# Altium PCB CC2530.PcbDoc
Units mm, origin at the board's own origin, x right, y up, seen from the top; angles counter-clockwise.
Board outline 70.89 x 30.94 mm, 2 copper layers (Top Layer, Bottom Layer); 62 components, 36 nets, 200 pads, 122 vias.
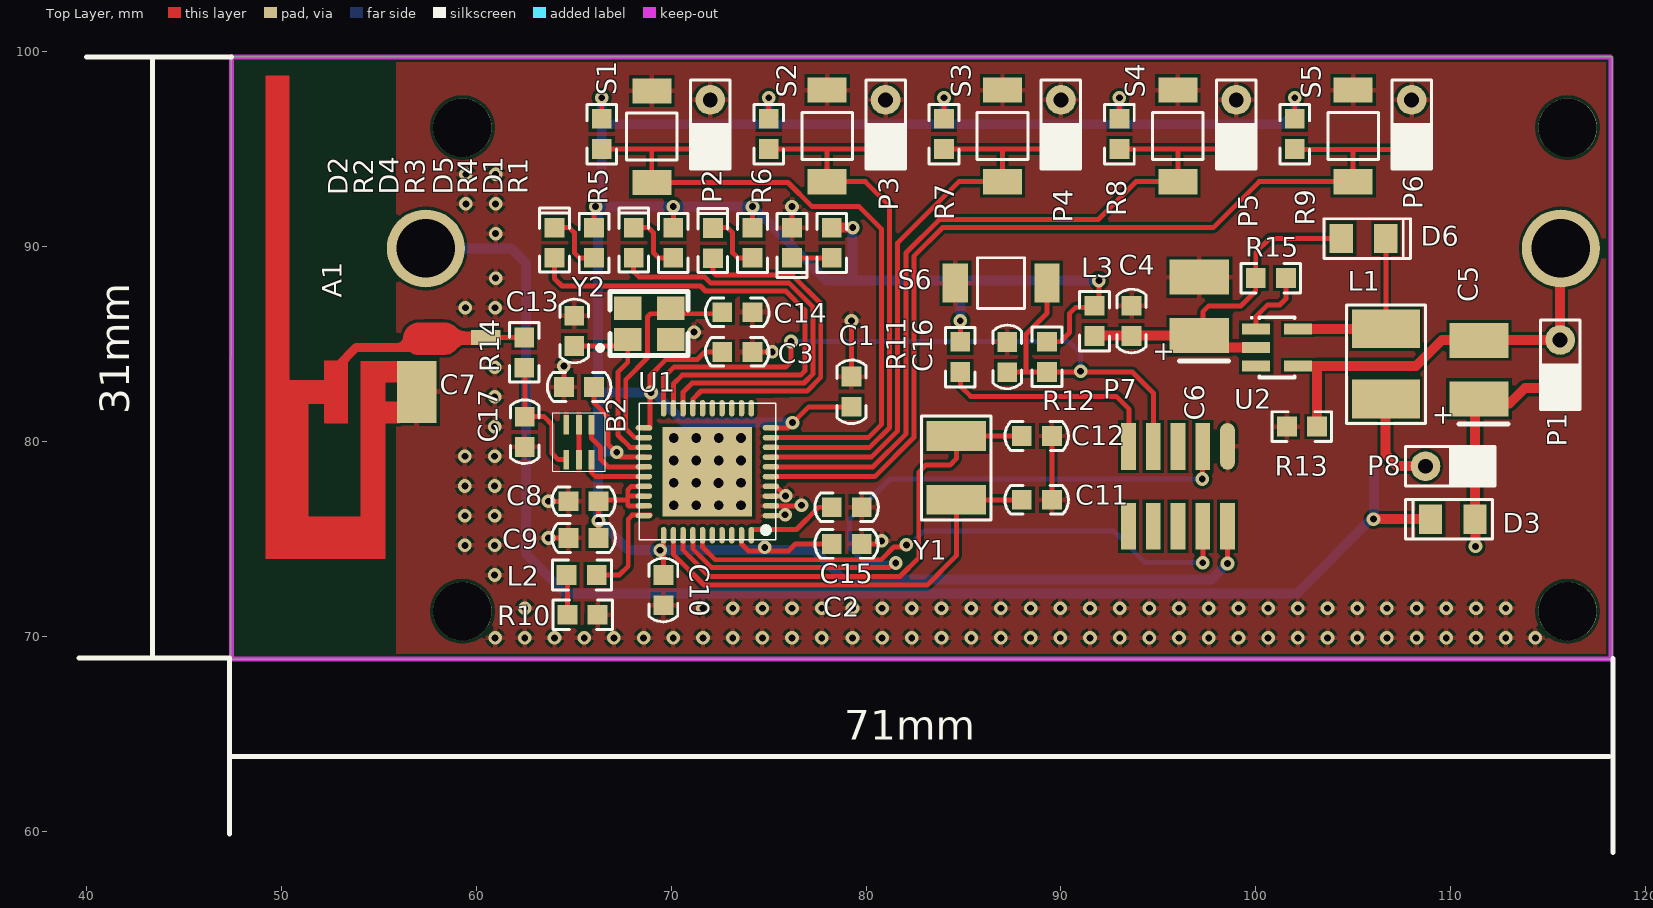
[diagram p0: Top Layer view]
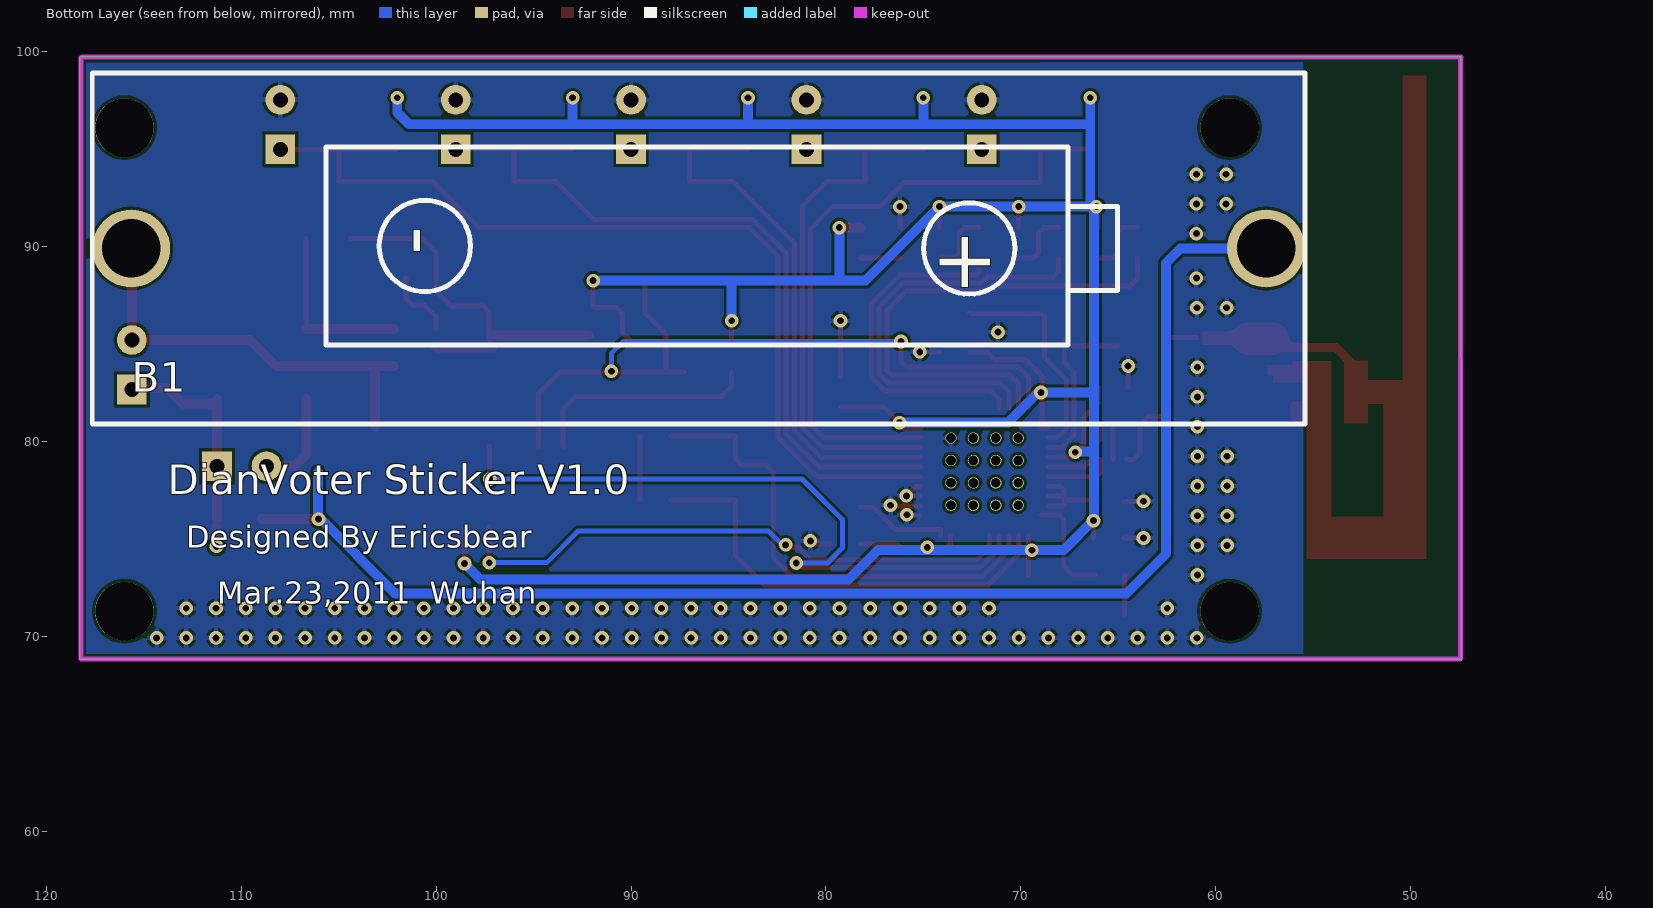
[diagram p1: Bottom Layer view, seen from below]

## Layer stack, top to bottom
Top Layer: signal copper 0.0356
Dielectric: dielectric 0.32, FR-4, Dk 4.8
Bottom Layer: signal copper 0.0356

## Board outline
47.422,99.746 118.288,99.746 118.288,68.834 47.422,68.834 47.396,68.809

## Design rules (kind name [scope] priority, off if disabled: settings)
Clearance [All] p1: gap=0.152
ComponentClearance [All] p1: gap=0.254 collisioncheckmode=3 verticalgap=0.254
PolygonConnect [All] p1: connectstyle=Relief reliefconductorwidth=0.254 reliefentries=4 polygonreliefangle="90 Angle"
RoutingVias [All] p1: holewidth=0.711 width=1.27 viastyle="Through Hole" minholewidth=0.152 minwidth=0.254 maxholewidth=0.711 maxwidth=1.27
SolderMaskExpansion [All] p1: expansion=0.102
TestPointUsage [All] p1: valid=0 allowmultiple=FALSE
Testpoint [All] p1: side=15 testpointundercomponent=TRUE minsize=1.016 maxsize=2.54 preferedsize=1.524 minholesize=0 maxholesize=1.016 preferedholesize=0.813 testpointgrid=0.025 style=1023 order=0123456789
Width [All] p1: maxlimit=1.016 minlimit=0.152 preferedwidth=0.254 minimp=50.000000 maximp=50.000000 favimp=50.000000
18 further rules are at their usual default settings.

## Components (designator, comment, footprint, x,y, rotation, side; value= is the part's Value field where it differs from the comment)
A1 "PCB_AN" AN 60.35,85.344 r90 top
B1 "Battery" Battery 57.404,89.916 r0 bottom locked
B2 "2450BM15A0002" "SSOP 6" 65.253,79.985 r90 top
C1 "C" 0603C 79.248,81.788 r90 top
C2 "C" 0603C 78.232,74.752 r0 top
C3 "C" 0603C 72.619,84.607 r0 top
C4 "C" 0603C 93.624,85.42 r90 top
C5 "DC" 1210C 111.455,83.693 r90 top
C6 "DC" 1210C 97.104,86.944 r90 top
C7 "C" 0603C 66.04,82.804 r180 top
C8 "C" 0603C 66.269,76.937 r180 top
C9 "C" 0603C 66.269,75.057 r180 top
C10 "C" 0603C 69.596,73.152 r270 top
C11 "C" 0603C 87.986,77.013 r0 top
C12 "C" 0603C 87.986,80.289 r0 top
C13 "C" 0603C 65.024,84.912 r90 top
C14 "C" 0603C 72.619,86.639 r0 top
C15 "C" 0603C 78.232,76.632 r0 top
C16 "C" 0603C 87.249,85.115 r270 top
C17 "C" 0603C 62.484,81.28 r270 top
D1 "LED" 0603LED 76.2,89.433 r90 top
D2 "LED" 0603LED 64.008,90.983 r270 top
D3 "1N40005" 0805D 108.966,76.022 r0 top
D4 "LED" 0603LED 68.072,90.983 r270 top
D5 "LED" 0603LED 72.136,90.957 r270 top
D6 "EDZ5.1B" SOD-523 106.68,90.424 r180 top
L1 "Lh" E(1812) 106.68,82.194 r90 top
L2 "L" 0603R 66.179,73.152 r180 top
L3 "L" 0603R 91.719,85.42 r90 top
P1 "Head 2*1" "HEAD 2*1" 115.621,82.677 r90 top
P2 "Head 2*1" "HEAD 2*1" 72,95 r90 top
P3 "Head 2*1" "HEAD 2*1" 81,95 r90 top
P4 "Head 2*1" "HEAD 2*1" 90,95 r90 top
P5 "Head 2*1" "HEAD 2*1" 99,95 r90 top
P6 "Head 2*1" "HEAD 2*1" 108,95 r90 top
P7 "JTAG" "HEAD 2*5" 93.472,79.756 r270 top locked
P8 "Head 2*1" "HEAD 2*1" 111.252,78.74 r180 top
R1 "R" 0603R 78.232,89.433 r90 top
R2 "R" 0603R 66.04,89.433 r90 top
R3 "R" 0603R 70.104,89.433 r90 top
R4 "R" 0603R 74.168,89.433 r90 top
R5 "R" 0603R 66.432,95.021 r90 top
R6 "R" 0603R 75,95.021 r90 top
R7 "R" 0603R 84,95.021 r90 top
R8 "R" 0603R 93,95.021 r90 top
R9 "R" 0603R 102,95.021 r90 top
R10 "R" 0603R 66.218,71.12 r180 top
R11 "R" 0603R 84.836,83.578 r90 top
R12 "R" 0603R 89.281,85.128 r270 top
R13 "R" 0603R 101.6,80.772 r0 top
R14 "R" 0603R 62.459,85.344 r270 top
R15 "R" 0603R 100,88.392 r0 top
S1 "SW" BUTTON 69,98 r270 top
S2 "SW" BUTTON 78,98.044 r270 top
S3 "SW" BUTTON 87,98.044 r270 top
S4 "SW" BUTTON 96,98.044 r270 top
S5 "SW" BUTTON 105,98.044 r270 top
S6 "SW" BUTTON 84.582,88.138 r0 top
U1 "CC2530F256RHAR" "QPN 40" 71.857,78.461 r90 top locked
U2 "NCP1402SN331T1" SOT23-5 101.092,84.836 r270 top
Y1 "XTAL" 1812 84.633,80.289 r270 top
Y2 "OSC" OSC 68.885,86.208 r180 top

## Footprints (in the part's own frame and the unit in brackets; to place one, negate y for a bottom-side part, rotate by r counter-clockwise, add the part's x,y. Pads: shape width x height; smd on the part's side, far side on the other; paste and mask are expansions set on the pad)
0603C [mil] "C"
  rect 40x40 smd: 1(0,0) 2(61,0)
  silkscreen extent -34,-29 95,29
0603LED [mil]
  rect 40x40 smd: 1(0,0) 2(61,0)
  silkscreen extent -40,-30 90,30
0603R [mil] "R"
  rect 40x40 smd: 1(0,0) 2(61,0)
  silkscreen extent -30,-30 90,30
0805D [mm]
  rect 1.2x1.5 smd: 1(0,0) 2(2.286,0)
  silkscreen extent -1.27,-1.02 3.17,1.02
1210C [mm]
  rect 1.8x3.048 smd: 1(-1.5,0) 2(1.5,0)
  silkscreen extent -2.79,-1.5 -2.79,1.02
1812 [mil]
  rect 60x120 smd: 1(0,0) 2(128.82,0)
  silkscreen extent -40,-70 170,70
AN [mil]
  rect 30x60 smd: 1(0,-5)
  rect 125x80 smd: 2(-110,134)
  Top Layer region: -447.98,197 -46.98,197 -46.98,248 -447.98,248
  Top Layer region: -133.98,321 -85.98,321 -85.98,440 -133.98,440
  Top Layer region: -173.98,273 -45.98,273 -45.98,321 -173.98,321
  Top Layer region: -447.98,353 -85.98,353 -85.98,440 -447.98,440
  Top Layer region: -447.98,197 -361.98,197 -361.98,440 -447.98,440
  Top Layer region: -93.49,394.37 527.58,394.37 527.58,437.68 -93.49,437.68
  Top Layer region: -12.78,-12.13 11.83,-12.13 11.83,58.74 -12.78,58.74
  Top Layer region: -12.79,-12.29 11.81,-12.29 11.81,47.75 -12.79,47.75
  Top Layer region: -169.13,165.2 -132.87,165.2 -132.87,171.11 -169.13,171.11
  Top Layer region: -15.75,153.39 -7.87,153.39 -7.87,165.2 -15.75,165.2
  Top Layer region: -10.83,-11.31 11.81,-11.31 11.81,51.69 -10.83,51.69
  Top Layer region: -83.5,287.25 -46.1,287.25 -46.1,321.7 -83.5,321.7
  Top Layer region: -173.05,274.29 -47.07,274.29 -47.07,321.53 -173.05,321.53
  Top Layer region: -90.38,129.61 -66.75,129.61 -66.75,200.99 -90.38,200.99
  Top Layer region: -83.66,287.25 -46.26,287.25 -46.26,321.7 -83.66,321.7
  Top Layer region: -173.21,274.29 -47.23,274.29 -47.23,321.53 -173.21,321.53
  Top Layer region: -76.93,118.94 -55.51,118.94 -55.51,171.11 -76.93,171.11
  Top Layer region: -90.53,129.61 -66.91,129.61 -66.91,200.99 -90.53,200.99
  Top Layer region: -14.76,-12.29 11.81,-12.29 11.81,52.67 -14.76,52.67
  Top Layer region: -173.98,168 -128.98,168 -128.98,200 -173.98,200
  Top Layer region: -90.98,169 -46.98,169 -46.98,201 -90.98,201
  Top Layer lines w3.94: -12.79,175.87 ccw(c1.97,174.88) 0.98,160.12 ; -13.78,170.95 ccw(c-2.46,171.44) -1.97,160.12 ; -22.64,86.3 ccw(c-26.57,80.39) -32.48,84.33
  Top Layer lines w5: -442.2,437.68 526.57,437.68 ; 500,437.68 526.57,437.68 ; 526.57,425.87 526.57,437.68 ; 526.57,413.07 526.57,394.37 ; 526.57,395.35 526.57,437.68 ; -141.73,394.37 526.57,394.37 ; 501.97,394.37 526.57,394.37 ; -25.59,147.32 -28.3,144.61 ccw(c-18.22,134.53) -32.48,134.53 -32.48,76.26 ccw(c-9.2,76.26) -25.66,59.79 -18.65,52.78 ccw(c-6.89,64.55) -6.89,47.91 ; 14.76,82.36 14.76,68.08 ; -6.89,78.43 -6.89,69.64 ccw(c9.91,69.64) -1.97,57.76 ; -6.89,68.58 -6.89,49.78 ; 21.65,59.72 20.28,58.35 ccw(c45.49,33.15) 9.84,33.15 ; -23.52,57.66 -19.59,53.72 cw(c-43.11,30.2) -9.84,30.2
  Top Layer lines w6: 11.81,143.38 cw(c11.81,138.63) 15.17,141.99 19.9,137.26 cw(c1.42,118.78) 27.56,118.78
  Top Layer lines w10: -13.78,56.77 cw(c-13.78,52.02) -10.42,55.38
  Top Layer lines w18.11: -58.89,295.15 -19.89,256.15 -19.89,135.99 ; -10.97,114.23 -4.84,114.23
  Top Layer lines w64.96: -1.97,129.79 -1.97,78.43
Battery [mm] "60mm*18mm"
  round 4 hole 3: 1(0,0) 2(58.25,0)
  silkscreen extent -2,-9 60.25,9
BUTTON [mm]
  rect 1.3x2 smd paste+0 mask+0.2: 1(0,0) 2(4.7,0)
  silkscreen extent 1.14,-1.3 3.56,1.3
E(1812) [mm]
  rect 2x3.5 smd: 1(0,0) 2(3.6,0)
  silkscreen extent -1.27,-2.03 4.83,2.03
"HEAD 2*1" [mil]
  rect 60x60 hole 30: 1(0,0)
  round 60 hole 30: 2(100,0)
  silkscreen extent -40,-40 140,40
"HEAD 2*5" [mm]
  oval 2.4x0.76 smd paste-0.01 mask+0.01: 1(0,5.08)
  rect 2.4x0.76 smd paste-0.01 mask+0.01: 2(4.1,5.08) 3(0,3.81) 4(4.1,3.81) 5(0,2.54) 6(4.1,2.54) 7(0,1.27) 8(4.1,1.27) 9(0,0) 10(4.1,0)
OSC [mm]
  rect 1.4x1.2 smd paste+0 mask+0.05: 1(1.118,0.965) 2(-1.082,0.965) 3(-1.082,-0.635) 4(1.118,-0.635)
  silkscreen extent -1.98,-1.5 2.67,1.78
"QPN 40" [mm]
  oval 0.28x0.85 smd paste+0 mask+0.14: 1(-2.255,-3.26) 2(-1.755,-3.26) 3(-1.255,-3.26) 4(-0.755,-3.26) 5(-0.255,-3.26) 6(0.245,-3.26) 7(0.745,-3.26) 8(1.245,-3.26) 9(1.745,-3.26) 10(2.245,-3.26) 21(2.245,3.26) 22(1.745,3.26) 23(1.245,3.26) 24(0.745,3.26) 25(0.245,3.26) 26(-0.255,3.26) 27(-0.755,3.26) 28(-1.255,3.26) 29(-1.755,3.26) 30(-2.255,3.26)
  oval 0.85x0.28 smd paste+0 mask+0.14: 11(3.255,-2.25) 12(3.255,-1.75) 13(3.255,-1.25) 14(3.255,-0.75) 15(3.255,-0.25) 16(3.255,0.25) 17(3.255,0.75) 18(3.255,1.25) 19(3.255,1.75) 20(3.255,2.25) 31(-3.265,2.25) 32(-3.265,1.75) 33(-3.265,1.25) 34(-3.265,0.75) 35(-3.265,0.25) 36(-3.265,-0.25) 37(-3.265,-0.75) 38(-3.265,-1.25) 39(-3.265,-1.75) 40(-3.265,-2.25)
  round 0.581 hole 0.5 paste+0 mask+0: 41(-1.725,-1.725) 41(-1.725,-0.575) 41(-1.725,0.575) 41(-1.725,1.725) 41(-0.58,-0.57) 41(-0.575,1.725) 41(-0.575,0.575) 41(-0.575,-1.725) 41(0.575,1.725) 41(0.575,-0.575) 41(0.575,0.575) 41(0.575,-1.725) 41(1.725,-1.725) 41(1.725,-0.575) 41(1.725,0.575) 41(1.725,1.725)
  rect 4.6x4.6 smd paste-4.6 mask+0: 41(0,0)
  silkscreen extent -3.5,-3.5 3.5,3.5
SOD-523 [mm]
  rect 1.2x1.5 smd: 1(0,0) 2(2.286,0)
  silkscreen extent -1.27,-1.02 3.17,1.02
SOT23-5 [mm]
  rect 0.55x1.45 smd: 1(-0.95,-1.075) 2(0,-1.075) 3(0.95,-1.075) 4(0.95,1.075) 5(-0.95,1.075)
  silkscreen extent -1.57,-1.35 1.55,0.9
"SSOP 6" [mm]
  rect 1x0.3 smd paste+0 mask+0.02: 1(-0.908,0.642) 2(-0.908,-0.008) 3(-0.908,-0.658) 4(0.892,-0.658) 5(0.892,-0.008) 6(0.892,0.642)
  silkscreen extent -1.51,-1.36 1.49,1.34

## Part data
A1: library part ANENTTA
D6: library part 1N40005
U1: library part CC2530
U2: library part NCP1402SN331

## Free pads (board coordinates)
  round 3 hole 3: 4(59.284,71.298) 4(59.284,96.114) 4(116,71.298) 4(116,96.114)

## Via types
v1: diameter 0.7, hole 0.35, Top Layer to Bottom Layer, 122 vias

## Nets (pads, with @x,y where several pads share a name; then routed paths per layer and width w, separated by ;. In a path a pad name is that pad's centre, name@x,y a point inside that pad or via, vN(x,y) a via of type N, cw(c..) or ccw(c..) an arc to the next point about the centre after c; other vN are vias at no path point)
AGND: B1.2 C5.2 P1.2 R13.2 U2.4 | length 21.7
  Top Layer w0.508: U2.4 108.219,83.886 109.55,85.217 P1.2@115.443,85.217 ; R13.2 103.149,83.861 103.175,83.886 ; P1.2 115.621,89.883 B1.2
DEB_DC: P7.3 U1.34 | length 36.4
  Top Layer w0.254: U1.34 71.107,74.512 72.085,73.533 81.178,73.533 v1@81.521,73.876 ; v1(97.257,78.08) 97.257,79.731 P7.3
  Bottom Layer w0.254: v1(81.521,73.774) 79.921,73.774 79.146,74.549 79.146,75.997 81.229,78.08 v1(97.257,78.08)
DEB_DD: P7.4 U1.35 | length 29.7
  Top Layer w0.254: U1.35 71.607,74.596 72.263,73.939 80.772,73.939 81.432,74.6 v1@82.144,74.6 ; v1(97.282,73.787) P7.4
  Bottom Layer w0.254: v1@82.144,74.6 82.956,75.413 92.71,75.413 94.336,73.787 v1(97.282,73.787)
  other v1: 82.067,74.701
GND: A1.2 B2.2 B2.5 B2.6 C1.2 C2.2 C3.2 C4.2 C6.2 C7.2 C8.2 C9.2 C10.2 C11.2 C12.2 C13.2 C14.2 C15.2 C16.1 C17.2 D1.2 P2.2 P3.2 P4.2 P5.2 P6.2 P7.1 R10.1 R13.1 S1.1 S2.1 S3.1 S4.1 S5.1 S6.1 U1.1 U1.2 U1.3 U1.4 U1.41@73.582,80.186 | length 18.1
  Top Layer w0.254: v1(63.703,75.057) C9.2 ; v1(63.703,76.937) C8.2 ; C7.2 v1(64.491,83.884) ; B2.2 B2.5 ; C3.2 v1(75.184,84.607) ; U1.2 v1@76.683,76.706 ; U1.4 75.124,77.699 75.387,77.699 v1(75.87,77.216) U1.3@75.157,77.216 ; U1.1@75.162,76.2 v1@75.844,76.2 ; D1.2 v1(76.2,92.063) ; C1.2 v1(79.248,86.208) ; C2.2 v1@80.797,74.752 ; C11.2 C12.2
  other v1: 60.96,69.926 62.484,69.926 64.008,69.926 65.532,69.926 67.056,69.926 68.58,69.926 70.104,69.926 71.628,69.926 73.152,69.926 74.676,69.926 76.2,69.926 77.724,69.926 79.299,69.926 80.823,69.926 82.347,69.926 83.871,69.926 85.395,69.926 86.919,69.926 88.443,69.926 89.967,69.926 91.491,69.926 93.015,69.926 94.539,69.926 96.063,69.926 97.587,69.926 99.111,69.926 100.635,69.926 102.159,69.926 103.683,69.926 105.207,69.926 106.731,69.926 108.255,69.926 109.779,69.926 111.303,69.926 112.827,69.926 114.351,69.926 62.484,71.45 71.628,71.45 73.152,71.45 74.676,71.45 76.2,71.45 77.724,71.45 79.299,71.45 80.823,71.45 82.347,71.45 83.871,71.45 85.395,71.45 86.919,71.45 88.443,71.45 89.967,71.45 91.491,71.45 93.015,71.45 94.539,71.45 96.063,71.45 97.587,71.45 99.111,71.45 100.635,71.45 102.159,71.45 103.683,71.45 105.207,71.45 106.731,71.45 108.255,71.45 109.779,71.45 111.303,71.45 112.827,71.45 60.935,73.152 59.411,74.676 60.935,74.676 80.797,74.905 59.411,76.2 60.935,76.2 75.844,76.251 76.683,76.733 59.411,77.724 60.935,77.724 59.411,79.248 60.935,79.248 60.935,80.772 60.935,82.296 60.935,83.82 71.171,85.623 59.436,86.868 60.96,86.868 60.985,88.392 60.985,90.678 59.461,92.202 60.985,92.202 59.461,93.726 60.985,93.726
LED_CON: D2.2 U1.19 | length 26
  Top Layer w0.254: D2.2 64.008,88.367 64.389,87.986 71.501,87.986 71.755,87.732 75.879,87.732 76.86,86.75 76.86,83.633 76.641,83.414 70.561,83.414 70.107,82.959 U1.19
LED_ON: D5.2 U1.17 | length 18.2
  Top Layer w0.254: U1.17 71.107,82.181 71.526,82.601 76.978,82.601 77.673,83.296 77.673,87.087 76.216,88.544 72.288,88.544 72.136,88.697 D5.2
LED_SEN: D4.2 U1.18 | length 22
  Top Layer w0.254: D4.2 68.072,88.722 68.351,88.443 71.73,88.443 72.034,88.138 76.048,88.138 77.267,86.919 77.267,83.464 76.81,83.007 71.069,83.007 70.607,82.545 U1.18
NetA1_1: A1.1 R14.1 | length 1.5
  Top Layer w0.254: A1.1@60.958,85.344 R14.1
NetB1_1: B1.1 D3.1 | length 71.6
  Top Layer w0.508: v1(106.045,76.022) D3.1
  Bottom Layer w0.508: B1.1 61.798,89.916 62.552,89.162 62.552,74.227 64.567,72.212 102.108,72.212 106.07,76.175 106.07,78.435
NetB2_1: B2.1 C17.1 R14.2 | length 6.4
  Top Layer w0.254: R14.2@62.484,83.795 C17.1 63.475,81.28 63.881,80.874 63.881,79.4 64.205,79.077 B2.1
NetB2_3: B2.3 U1.26 | length 3.4
  Top Layer w0.254: B2.3 65.913,79.074 65.913,78.41 66.117,78.206 U1.26
NetB2_4: B2.4 U1.25 | length 4.4
  Top Layer w0.254: B2.4 65.911,80.165 66.37,79.705 66.37,79.096 66.76,78.706 U1.25
NetC5_1: C5.1 D3.2 P1.1 P8.1 | length 11.9
  Top Layer w0.508: C5.1@111.251,82.194 111.252,82.193 D3.2 ; C5.1@111.252,81.966 113.03,81.966 113.817,82.753 115.545,82.753 P1.1 ; v1(111.277,74.625) D3.2@111.277,75.641
NetC11_1: C11.1 U1.32 Y1.2 | length 23
  Top Layer w0.254: U1.32 70.107,74.216 71.679,72.644 83.134,72.644 84.633,74.143 Y1.2 84.637,77.013 C11.1
NetC12_1: C12.1 U1.33 Y1.1 | length 25
  Top Layer w0.254: U1.33 70.607,74.427 71.958,73.076 81.737,73.076 82.702,74.041 82.702,78.435 83.058,78.791 84.303,78.791 84.633,79.121 Y1.1 C12.1
NetC13_1: C13.1 U1.23 Y2.1 | length 9
  Top Layer w0.254: C13.1 Y2.1@67.31,84.912 ; Y2.1 67.767,84.074 67.259,83.566 67.259,80.34 67.894,79.706 U1.23
NetC14_1: C14.1 U1.22 Y2.3 | length 11.3
  Top Layer w0.254: U1.22 68.13,80.206 67.666,80.67 67.666,83.185 68.783,84.303 68.783,86.411 68.936,86.563 72.542,86.563 C14.1 ; Y2.3@69.647,86.563 Y2.3@69.698,86.512
NetC15_1: C15.1 U1.40 | length 4.9
  Top Layer w0.254: U1.40 74.107,75.489 76.429,75.489 77.572,76.632 C15.1
NetD1_1: D1.1 R1.1 | length 2
  Top Layer w0.254: D1.1 R1.1
NetD2_1: D2.1 R2.1 | length 3.3
  Top Layer w0.254: D2.1 64.77,90.983 65.024,90.729 65.024,89.687 65.278,89.433 R2.1
NetD4_1: D4.1 R3.1 | length 3.3
  Top Layer w0.254: D4.1 68.834,90.983 69.088,90.729 69.088,89.687 69.342,89.433 R3.1
NetD5_1: D5.1 R4.1 | length 3.3
  Top Layer w0.254: D5.1@72.136,90.983 72.898,90.983 73.152,90.729 73.152,89.687 73.406,89.433 R4.1
NetD6_1: D6.1 L1.2 U2.5 | length 9.1
  Top Layer w0.254: L1.2 D6.1
  Top Layer w0.508: U2.5 L1.2@106.68,85.786
NetL1_1: L1.1 P8.2 | length 5.2
  Top Layer w0.508: L1.1 106.655,82.169 106.655,79.35 107.264,78.74 P8.2
NetL2_1: L2.1 U1.30 | length 5.4
  Top Layer w0.254: L2.1 67.335,73.152 67.793,73.609 67.793,76.022 67.996,76.225 U1.30@68.936,76.225
NetL2_2: L2.2 R10.2 | length 2
  Top Layer w0.254: L2.2 64.668,73.113 R10.2
NetP7_9: P7.9 R11.1 | length 11.8
  Top Layer w0.254: R11.1 84.836,82.855 85.369,82.321 92.837,82.321 93.497,81.661 93.497,79.781 P7.9
NetR15_2: R15.2 U2.1 | length 3.6
  Top Layer w0.254: U2.1 100.017,86.428 100.609,87.02 101.244,87.02 101.549,87.325 R15.2
NRESET: C16.2 P7.7 R12.2 S6.2 U1.20 | length 41.2
  Top Layer w0.254: U1.20 69.607,83.297 70.129,83.82 75.87,83.82 76.149,84.099 v1(76.149,85.141) ; C16.2 93.675,83.566 94.742,82.499 P7.7 ; 88.214,83.566 88.214,85.522 89.282,86.59 S6.2 ; R12.2@89.269,83.566 R12.2
  Bottom Layer w0.254: v1(76.149,85.141) 90.399,85.141 91.008,84.531 v1(91.008,83.617)
SWITCHA: P2.1 R5.1 S1.2 U1.9 | length 36.1
  Top Layer w0.254: R5.1 71.979,95.021 P2.1 ; 68.961,95.021 69,94.982 S1.2 75.991,93.3 77.216,92.075 79.629,92.075 80.797,90.907 80.797,80.899 80.104,80.206 U1.9
SWITCHB: P3.1 R6.1 S2.2 U1.8 | length 29.2
  Top Layer w0.254: R6.1 80.721,95.021 P3.1@80.874,95.174 ; U1.8 80.188,79.706 81.21,80.728 81.21,92.094 79.96,93.344 S2.2 78,94.999 77.978,95.021
SWITCHC: P4.1 R7.1 S3.2 U1.7 | length 31.1
  Top Layer w0.254: U1.7 80.269,79.206 81.621,80.558 81.621,90.207 84.759,93.344 S3.2 87,95.016 86.995,95.021 ; R7.1 89.979,95.021 P4.1
SWITCHD: P5.1 R8.1 S4.2 U1.6 | length 40.1
  Top Layer w0.254: U1.6 80.357,78.706 82.037,80.386 82.037,89.682 83.75,91.396 91.904,91.396 93.852,93.344 S4.2 96,94.982 95.961,95.021 ; R8.1 98.979,95.021 P5.1
SWITCHE: P6.1 R9.1 S5.2 U1.5 | length 49.3
  Top Layer w0.254: U1.5 80.441,78.206 82.45,80.215 82.45,89.511 83.922,90.983 97.815,90.983 100.177,93.344 S5.2 105,94.953 104.953,95 ; R9.1 102.021,95 P6.1
VCC: C1.1 C2.1 C3.1 C7.1 C8.1 C9.1 C10.1 L3.2 P7.2 R1.2 R2.2 R3.2 R4.2 R5.2 R6.2 R7.2 R8.2 R9.2 R11.2 R12.1 U1.10 U1.21 U1.24 U1.27 U1.28 U1.29 U1.31 U1.39 | length 189.1
  Top Layer w0.254: C7.1 66.04,81.991 66.751,81.28 66.751,79.858 67.403,79.206 U1.24 ; R2.2 v1@66.04,92.063 ; C9.1 C8.1 66.345,77.013 67.767,77.013 ; R5.2 v1(66.432,97.65) ; 67.778,77.206 U1.28 ; U1.29 67.795,76.706 67.767,76.733 67.767,77.521 67.952,77.706 U1.27 ; U1.21 68.92,80.706 68.92,83.398 69.748,84.226 71.349,84.226 71.73,84.607 C3.1 ; C10.1@69.607,73.152 U1.31 ; R3.2 v1(70.104,92.063) ; U1.39 73.607,74.755 73.965,74.397 76.022,74.397 76.378,74.752 C2.1 ; R4.2 v1(74.168,92.063) ; R6.2 v1(75,97.65) ; U1.10 75.981,80.706 77.064,81.788 C1.1 ; R7.2 v1(84,97.65) ; R11.2 v1(84.836,86.208) ; R12.1 89.979,85.128 90.449,85.598 90.449,86.589 90.754,86.893 L3.2@91.872,86.893 ; L3.2@91.948,86.97 v1(91.948,88.265) ; R8.2 v1(93,97.65) ; v1(98.552,73.748) P7.2 ; R9.2 v1(102,97.65)
  Top Layer w0.508: R1.2 v1(79.312,90.983)
  Bottom Layer w0.508: 66.243,79.197 66.252,79.206 ; 66.243,82.525 69.113,82.525 70.663,80.975 v1(76.225,80.975) ; 66.252,79.485 v1@67.2,79.485 ; v1@66.432,92.074 v1(66.432,97.65) ; 66.432,96.291 101.397,96.291 102,96.895 v1(102,97.65) ; 74.981,96.291 75,96.311 v1(75,97.65) ; 79.312,88.277 v1(79.312,90.983) ; 84,96.294 v1(84,97.65) ; v1(84.836,86.208) 84.836,88.265 ; v1(91.948,88.265) 77.966,88.265 v1(74.168,92.063) 66.243,92.063 66.243,75.997 67.793,74.447 77.318,74.447 78.842,72.923 97.727,72.923 v1(98.552,73.748) ; 93,96.302 v1(93,97.65)
  other v1: 69.429,74.422 74.803,74.574 66.269,75.946 67.2,79.46 68.961,82.525 66.116,92.063
VDD: C4.1 C6.1 D6.2 L3.1 R15.1 U2.2 | length 19.2
  Top Layer w0.254: C6.1@97.257,85.217 97.282,85.242 97.282,86.665 97.587,86.97 99.238,86.97 100,87.732 100,89.713 100.711,90.424 D6.2
  Top Layer w0.508: L3.1@92.15,85.444 C6.1 ; C6.1@97.106,84.836 U2.2
pads on no net: P7.5 P7.6 P7.8 P7.10 U1.11 U1.12 U1.13 U1.14 U1.15 U1.16 U1.36 U1.37 U1.38 U1.41@70.132,76.736 U1.41@70.132,77.886 U1.41@70.132,79.036 U1.41@70.132,80.186 U1.41@71.282,76.736 U1.41@71.282,77.886 U1.41@71.282,79.036 U1.41@71.282,80.186 U1.41@71.857,78.461 U1.41@72.427,77.881 U1.41@72.432,76.736 U1.41@72.432,79.036 U1.41@72.432,80.186 U1.41@73.582,76.736 U1.41@73.582,77.886 U1.41@73.582,79.036 U2.3 Y2.2 Y2.4

## Polygon pours and split planes (outlines as drawn)
GND on Top Layer "Top Layer-No Net" (solid, pour order 1000): 55.88,99.746 55.88,68.783 118.288,68.783 118.288,99.746
GND on Bottom Layer "Top Layer-No Net" (solid, pour order 1001): 55.499,99.466 55.499,69.007 118.008,69.007 118.008,99.441

## Keep-outs
Keep-Out Layer:
  lines w0.254: 47.396,99.746 118.212,99.746 ; 47.422,68.859 47.422,99.72 ; 47.447,68.834 118.237,68.834 118.237,99.72

## Silkscreen, mask and mechanical layers (free items; w line width, h text height)
Top Overlay:
  lines w0.254: 39.599,68.885 47.32,68.885 47.32,59.868 ; 39.98,99.746 47.422,99.746 ; 43.383,68.885 43.383,99.746 ; 47.32,63.83 118.135,63.83 ; 118.339,58.903 118.339,68.859
  text "Leghth:  71mm" at 52.197,113.513 h1.52
  text "Width:   31mm" at 52.4,110.414 h1.52
  text "Copper Thickness:   1 oz" at 52.248,107.29 h1.52
  text "Via: Block Off" at 52.527,104.419 h1.52
  text "31mm" at 42.189,81.407 h1.52 r90
  text "71mm" at 78.867,64.694 h1.52
Bottom Overlay:
  text "DianVoter Sticker V1.0" at 113.767,77.292 h1.52
  text "Designed By Ericsbear" at 112.827,74.549 h1.14
  text "Mar.23,2011  Wuhan" at 111.227,71.679 h1.14
Mechanical 1:
  lines w0.254: 118.212,99.746 118.237,99.72

## Text inside footprints (layer, text, board x,y; h text height)
B1: Bottom Overlay "-" at 102.108,91.059 h3 r90; Bottom Overlay "+" at 74.168,90.932 h3 r90
C5: Top Overlay "+" at 110.058,80.772 h1.02 r90
C6: Top Overlay "+" at 95.707,84.023 h1.02 r90